# Altium PCB RT_SUPER_EXT.PCBdoc
Units mil, origin at the board's own origin, x right, y up, seen from the top; angles counter-clockwise.
Board outline 350 x 2500 mil, 2 copper layers (Top Layer, Bottom Layer), stack 6.8 mil thick; 2 components, 12 nets, 48 pads, 72 vias.
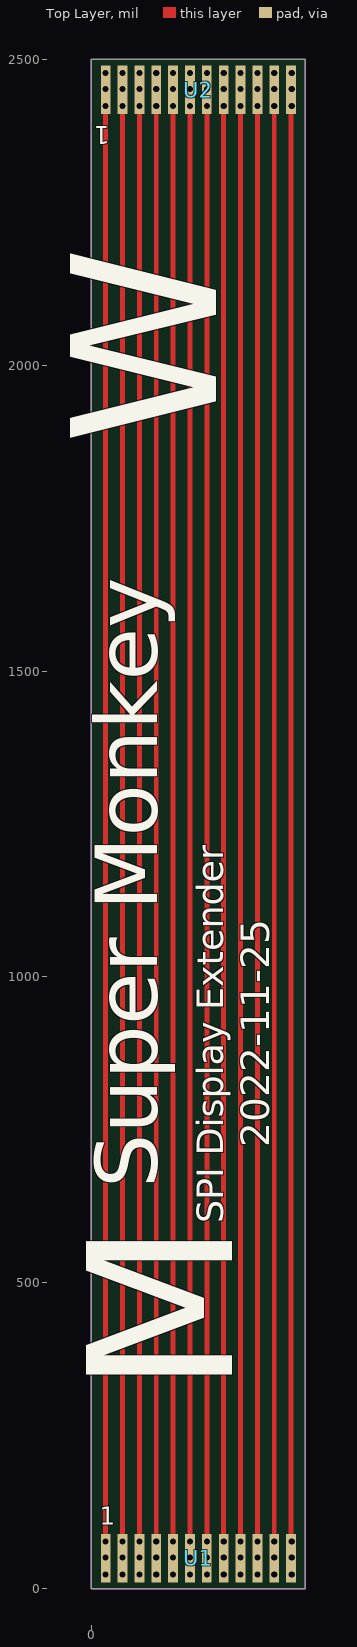
[diagram p0: Top Layer view]
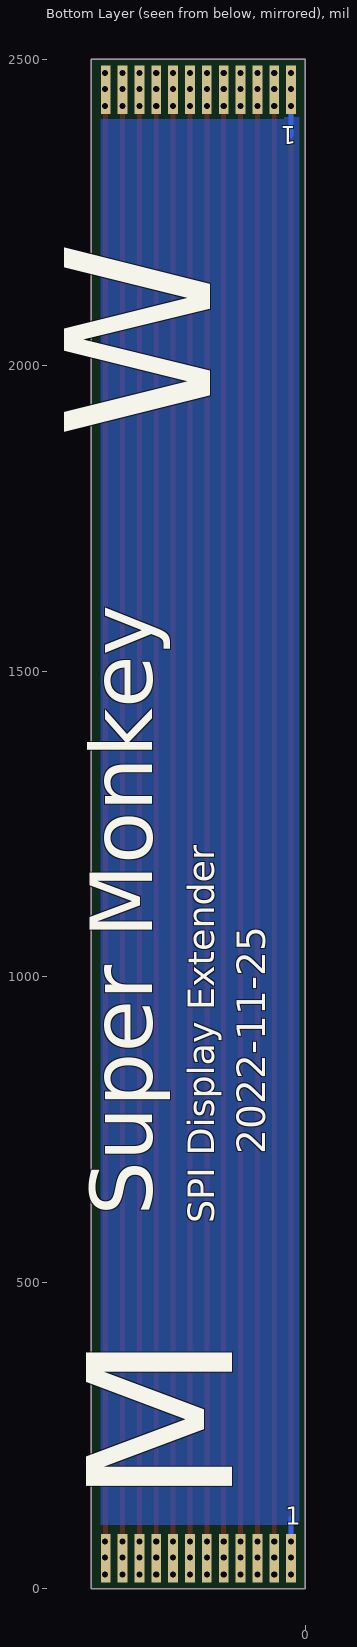
[diagram p1: Bottom Layer view, seen from below]

## Layer stack, top to bottom
Top Solder: solder mask 1, Solder Resist, Dk 3.5
Top Layer: signal copper 1.4
Dielectric1: core 4, Core-025, Dk 4.6
Bottom Layer: signal copper 1.4
Bottom Solder: solder mask 1, Solder Resist, Dk 3.5

## Board outline
0,0 0,2500 350,2500 350,0

## Design rules (kind name [scope] priority, off if disabled: settings)
Clearance [All] p1: gap=5 ignorepadtopadclearanceinfootprint=FALSE except(8: Arc-Poly Track-Poly SMDPad-Poly THPad-Poly Via-Poly Fill-Poly Poly-Poly)
ComponentClearance ComponentClearance_1 [HasFootprint('ER-TFT1.54-1')] p1: gap=0 collisioncheckmode=3 verticalgap=0 showdistances=FALSE
ComponentClearance [All] p2: gap=10 collisioncheckmode=3 verticalgap=10 showdistances=FALSE
DiffPairsRouting [All] p1: maxlimit=10 minlimit=10 mostfreqgap=10 substack1={33EDACA6-669A-4D7A-B0AE-E8B1CE52F815} toplayer_{33edaca6-669a-4d7a-b0ae-e8b1ce52f815}_minwidth=15 toplayer_{33edaca6-669a-4d7a-b0ae-e8b1ce52f815}_maxwidth=15 toplayer_{33edaca6-669a-4d7a-b0ae-e8b1ce52f815}_prefwidth=15 bottomlayer_{33edaca6-669a-4d7a-b0ae-e8b1ce52f815}_minwidth=15 bottomlayer_{33edaca6-669a-4d7a-b0ae-e8b1ce52f815}_maxwidth=15 bottomlayer_{33edaca6-669a-4d7a-b0ae-e8b1ce52f815}_prefwidth=15 toplayer_minwidth=15 toplayer_maxwidth=15 toplayer_prefwidth=15 bottomlayer_minwidth=15 bottomlayer_maxwidth=15 bottomlayer_prefwidth=15 maxuncoupledlength=500
PlaneClearance [All] p1: clearance=10
PolygonConnect PolygonConnect_2 [InNet('GND')] p1: thpad.connectstyle=Direct thpad.reliefconductorwidth=10 thpad.reliefentries=4 thpad.polygonreliefangle="90 Angle" thpad.airgapwidth=10 smdpad.connectstyle=Relief smdpad.reliefconductorwidth=10 smdpad.reliefentries=4 smdpad.polygonreliefangle="90 Angle" smdpad.airgapwidth=10 via.connectstyle=Direct via.reliefconductorwidth=10 via.reliefentries=4 via.polygonreliefangle="90 Angle" via.airgapwidth=10
PolygonConnect PolygonConnect_1 [IsVia] p2: connectstyle=Direct reliefconductorwidth=10 reliefentries=4 polygonreliefangle="90 Angle" airgapwidth=10
PolygonConnect [All] p3: connectstyle=Relief reliefconductorwidth=10 reliefentries=4 polygonreliefangle="90 Angle" airgapwidth=5
RoutingVias [All] p1: holewidth=12 width=26 viastyle="Through Hole" minholewidth=6 minwidth=6 maxholewidth=50 maxwidth=75
SilkToSolderMaskClearance SilkscreenOverComponentPads [IsPad] p1: minsilkscreentomaskgap=10 clearancetoexposedcopper=TRUE
SolderMaskExpansion [All] p1: expansion=4 istentingtop=FALSE
Width [All] p1: maxlimit=200 minlimit=5 preferedwidth=5 substack1={33EDACA6-669A-4D7A-B0AE-E8B1CE52F815}
26 further rules are at their usual default settings.

## Components (designator, comment, footprint, x,y, rotation, side; value= is the part's Value field where it differs from the comment)
U1 "ER-TFT1.54__EXT" "ER-TFT1.54-1 - EXT" 175,50 r180 top
U2 "ER-TFT1.54__EXT" "ER-TFT1.54-1 - EXT" 175,2450 r180 top

## Footprints (in the part's own frame and the unit in brackets; to place one, negate y for a bottom-side part, rotate by r counter-clockwise, add the part's x,y. Pads: shape width x height; smd on the part's side, far side on the other; paste and mask are expansions set on the pad)
"ER-TFT1.54-1 - EXT" [mil]
  rect 16x80 smd far side mask+0: 1(151.57,0) 2(124.02,0) 3(96.46,0) 4(68.9,0) 5(41.34,0) 6(13.78,0) 7(-13.78,0) 8(-41.34,0) 9(-68.9,0) 10(-96.46,0) 11(-124.02,0) 12(-151.57,0)
  rect 16x80 smd mask+0: 1(151.57,0) 2(124.02,0) 3(96.46,0) 4(68.9,0) 5(41.34,0) 6(13.78,0) 7(-13.78,0) 8(-41.34,0) 9(-68.9,0) 10(-96.46,0) 11(-124.02,0) 12(-151.57,0)

## Part data
U1 U2: "EXTENTION FOOTPRINT", Manufacturer="Buy Display", Manufacturer Part Number=ER-TFT1.54-1

## Via types
v1: diameter 10, hole 10, Top Layer to Bottom Layer, tented both sides, 72 vias

## Nets (pads, with @x,y where several pads share a name; then routed paths per layer and width w, separated by ;. In a path a pad name is that pad's centre, name@x,y a point inside that pad or via, vN(x,y) a via of type N, cw(c..) or ccw(c..) an arc to the next point about the centre after c; other vN are vias at no path point)
NetU1_1: U1.1 U2.1 | length 2487.9
  Top Layer w8: U1.1@23.43,50 U2.1@23.43,2450
  Bottom Layer w8: 23,116 23.43,116 v1(23.43,77.56) ; v1(23.43,2423.43) 23.43,2375 24,2375
  other v1: 23.43,23.43 23.43,50.98 23.43,2450.98 23.43,2477.56
NetU1_2: U1.2 U2.2 | length 2400
  Top Layer w8: v1(50.98,50.98) 50.98,2450 v1(50.98,2450.98)
  other v1: 50.98,23.43 50.98,77.56 50.98,2423.43 50.98,2477.56
NetU1_3: U1.3 U2.3 | length 2400
  Top Layer w8: v1(78.54,50.98) 78.54,2450 v1(78.54,2450.98)
  other v1: 78.54,23.43 78.54,77.56 78.54,2423.43 78.54,2477.56
NetU1_4: U1.4 U2.4 | length 2400
  Top Layer w8: v1(106.1,50.98) 106.1,2450 v1(106.1,2450.98)
  other v1: 106.1,23.43 106.1,77.56 106.1,2423.43 106.1,2477.56
NetU1_5: U1.5 U2.5 | length 2400
  Top Layer w8: v1(133.66,50.98) 133.66,2450 v1(133.66,2450.98)
  other v1: 133.66,23.43 133.66,77.56 133.66,2423.43 133.66,2477.56
NetU1_6: U1.6 U2.6 | length 2400
  Top Layer w8: v1(161.22,50.98) 161.22,2450 v1(161.22,2450.98)
  other v1: 161.22,23.43 161.22,77.56 161.22,2423.43 161.22,2477.56
NetU1_7: U1.7 U2.7 | length 2400
  Top Layer w8: v1(188.78,50.98) 188.78,2450 v1(188.78,2450.98)
  other v1: 188.78,23.43 188.78,77.56 188.78,2423.43 188.78,2477.56
NetU1_8: U1.8 U2.8 | length 2400
  Top Layer w8: v1(216.34,50.98) 216.34,2450 v1(216.34,2450.98)
  other v1: 216.34,23.43 216.34,77.56 216.34,2423.43 216.34,2477.56
NetU1_9: U1.9 U2.9 | length 2400
  Top Layer w8: v1(243.9,50.98) 243.9,2450 v1(243.9,2450.98)
  other v1: 243.9,23.43 243.9,77.56 243.9,2423.43 243.9,2477.56
NetU1_10: U1.10 U2.10 | length 2400
  Top Layer w8: v1(271.46,50.98) 271.46,2450 v1(271.46,2450.98)
  other v1: 271.46,23.43 271.46,77.56 271.46,2423.43 271.46,2477.56
NetU1_11: U1.11 U2.11 | length 2372.4
  Top Layer w8: v1(299.02,50.98) v1(299.02,77.56) v1(299.02,2423.43)
  other v1: 299.02,23.43 299.02,2450.98 299.02,2477.56
NetU1_12: U1.12 U2.12 | length 2400.8
  Top Layer w8: v1(327.56,50.98) 326.57,51.97 326.57,2450 v1(327.56,2450.98)
  other v1: 327.56,23.43 327.56,77.56 327.56,2423.43 327.56,2477.56

## Polygon pours and split planes (outlines as drawn)
NetU1_1 on Bottom Layer "NETU1_1_L02_P000" (solid, remove dead copper, pour order 0): 10,105 10,2405 335,2405 335,105

## Keep-outs
Keep-Out Layer:
  the board outline again, w1

## Silkscreen, mask and mechanical layers (free items; w line width, h text height)
Top Overlay:
  text "W" at 300,1870 h500 r90
  text "2022-11-25" at 306,722 h80 r90
  text "Super Monkey" at 141,655 h175 r90
  text "M" at 350,600 h625 r90
  text "SPI Display Extender" at 230,597.5 h75 r90
Bottom Overlay:
  text "1" at 15,2400 h50 r180
  text "W" at 60,1880 h500 r270
  text "2022-11-25" at 50,710 h80 r270
  text "Super Monkey" at 217,610 h175 r270
  text "SPI Display Extender" at 134,597.5 h75 r270
  text "M" at 0,136 h625 r270
  text "1" at 33,95 h50
[8] Board Outline:
  the board outline again, w10

## Text inside footprints (layer, text, board x,y; h text height)
U1: Top Overlay "1" at 14,95 h50
U2: Top Overlay "1" at 30,2400 h50 r180